# Altium PCB PCB_chargePump_2_2021-07-19.pcbdoc
Units mm, origin at the board's own origin, x right, y up, seen from the top; angles counter-clockwise.
Board outline 157.86 x 100.64 mm, 2 copper layers (Top Layer, Bottom Layer); 10 components, 5 nets, 28 pads, 1 vias.
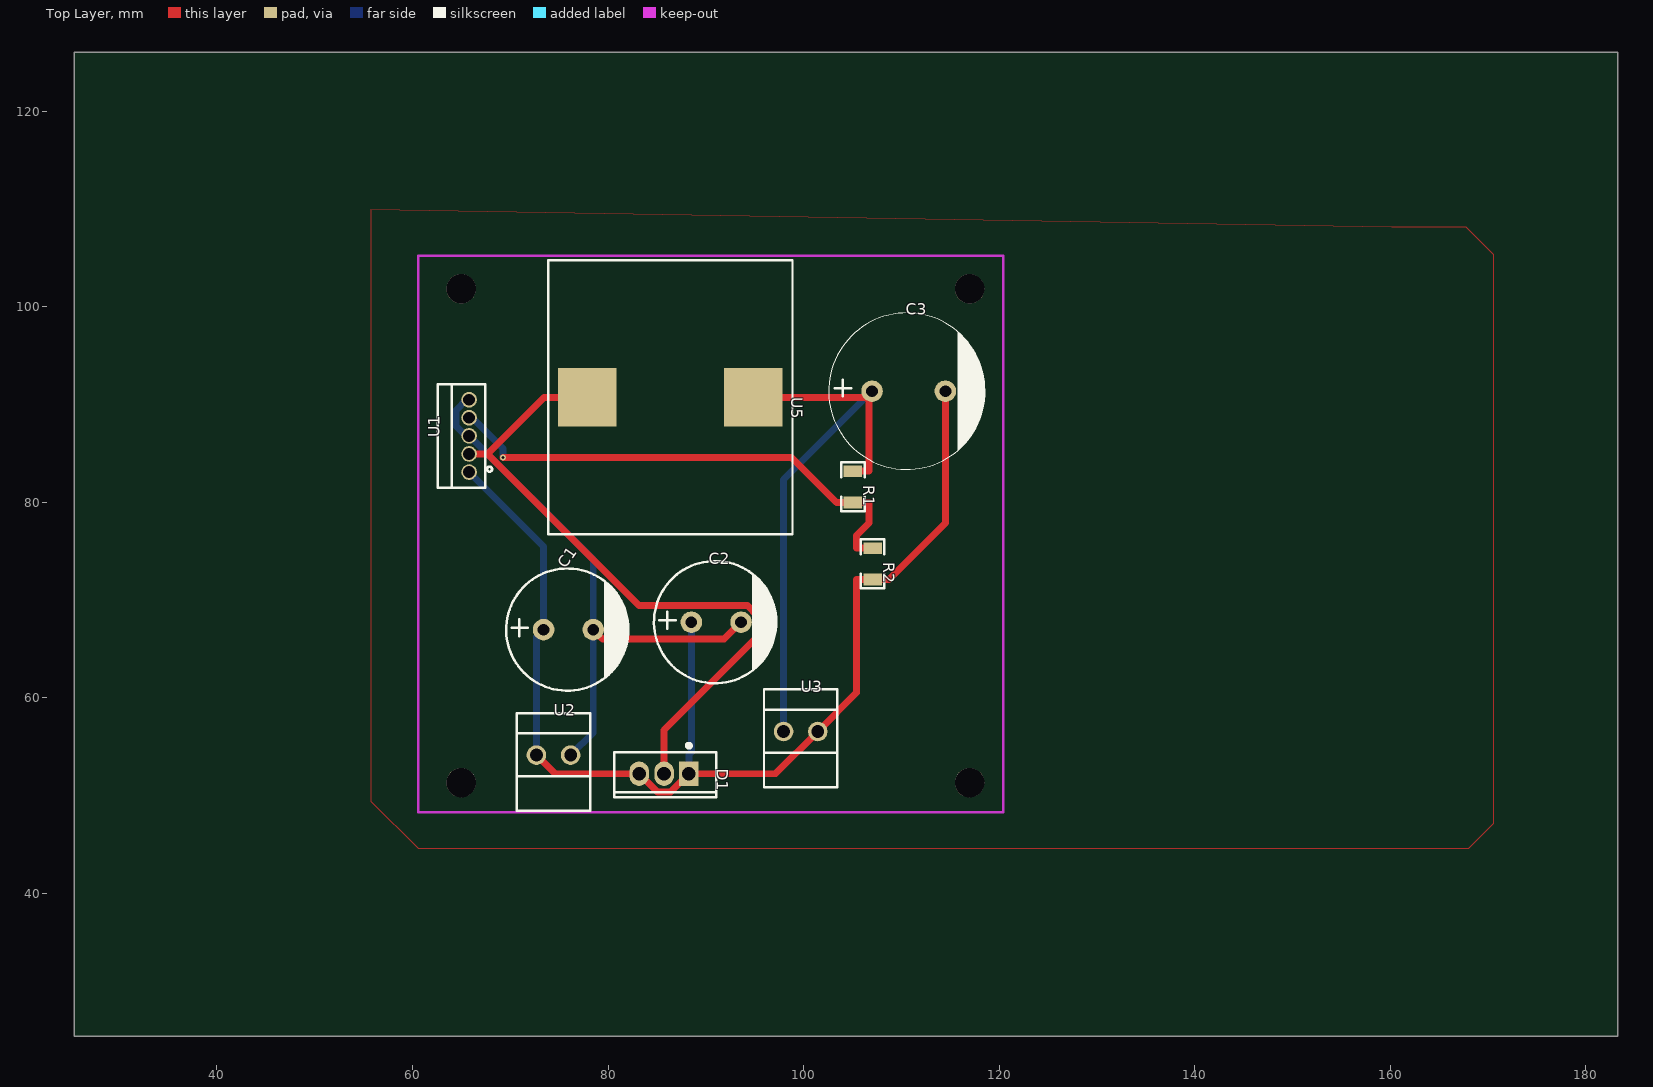
[diagram p0: Top Layer view]
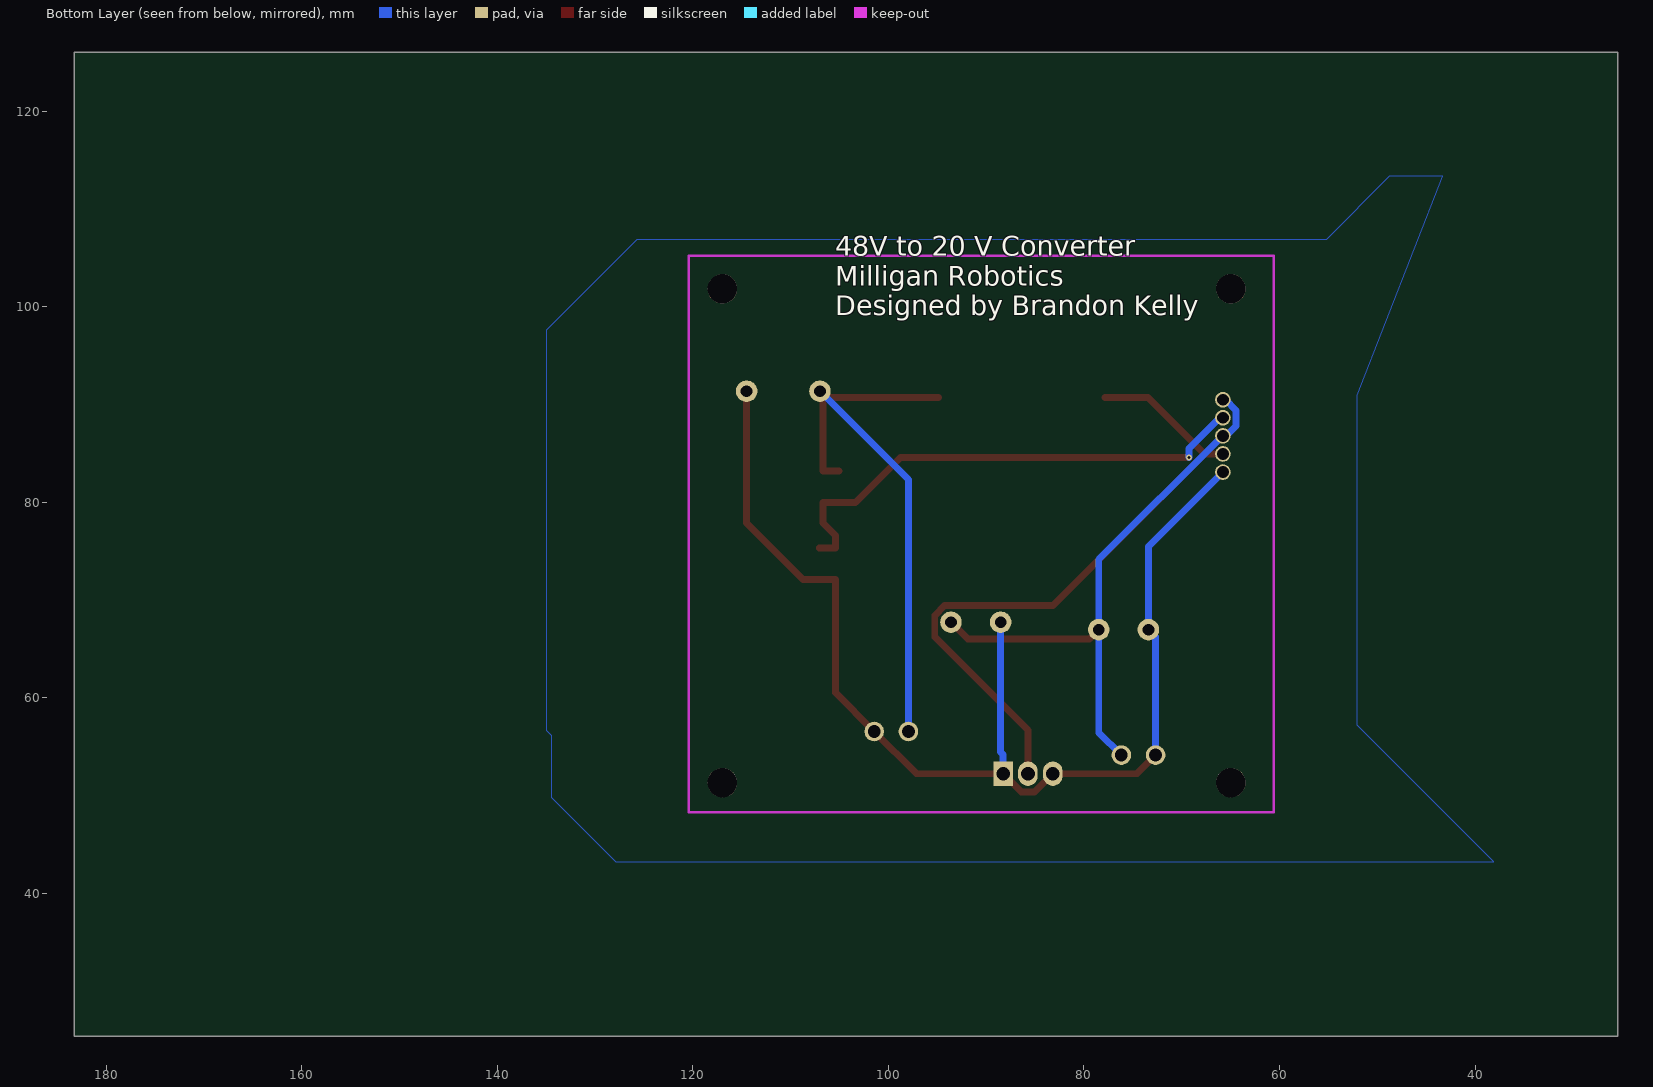
[diagram p1: Bottom Layer view, seen from below]

## Layer stack, top to bottom
Top Layer: signal copper (thickness not stored)
Dielectric: dielectric 0.32, FR-4, Dk 4.8
Bottom Layer: signal copper (thickness not stored)

## Board outline
183.261,25.4 25.4,25.4 25.4,126.037 183.261,126.037

## Components (designator, comment, footprint, x,y, rotation, side; value= is the part's Value field where it differs from the comment)
C1 "220uF" CAP-TH_BD12.5-P5.00-D1.2-FD 75.946,66.982 r0 top
C2 "220uF" CAP-TH_BD12.5-P5.00-D1.2-FD 91.059,67.744 r0 top
C3 "330uF" CAP-TH_BD16.0-P7.50-D1.2-FD 110.744,91.366 r0 top
D1 "STPS2030CT" TO-220AB-3_L10.4-W4.6-P2.54-T 85.725,52.25 r270 top
R1 "15.4K" R1206 105.029,81.587 r270 top
R2 "1K" R1206 107.061,73.713 r270 top
U1 "LM2576HVT-ADJ" TO-220-5L_L10.2-W4.5-P1.71-L 65.786,86.794 r90 top
U2 "TV0211500000G" CONN-TH_TV0211500000G 74.422,54.155 r0 top
U3 "TV0211500000G" CONN-TH_TV0211500000G 99.695,56.568 r0 top
U5 "power inductor 330uH" "WURTH 330UH" 86.36,90.731 r270 top

## Footprints (in the part's own frame and the unit in brackets; to place one, negate y for a bottom-side part, rotate by r counter-clockwise, add the part's x,y. Pads: shape width x height; smd on the part's side, far side on the other; paste and mask are expansions set on the pad)
CAP-TH_BD12.5-P5.00-D1.2-FD [mm]
  round 2.2 hole 1.2: 1(-2.54,0) 2(2.54,0)
  silkscreen extent -6.37,-6.25 6.17,6.25
CAP-TH_BD16.0-P7.50-D1.2-FD [mm]
  round 2.2 hole 1.2: 1(-3.75,0) 2(3.75,0)
  silkscreen extent -8.19,-8 7.81,8
CONN-TH_TV0211500000G [mm]
  round 2 hole 1.3: 1(-1.75,0) 2(1.75,0)
  silkscreen extent -3.75,-5.7 3.75,4.3
R1206 [mm]
  rect 1.2x1.9 smd: 1(-1.6,0) 2(1.6,0)
  silkscreen extent -2.5,-1.2 2.5,1.2
TO-220-5L_L10.2-W4.5-P1.71-L [mm]
  round 1.6 hole 1.2: 1(-3.7,0) 2(-1.85,0) 3(0,0) 4(1.85,0) 5(3.7,0)
  silkscreen extent -5.3,-2.35 5.3,3.18
TO-220AB-3_L10.4-W4.6-P2.54-T [mm]
  rect 2.5x2 hole 1.4: 1(0,2.54)
  oval 2.5x2 hole 1.4: 2(0,0) 3(0,-2.54)
  silkscreen extent -3.07,-5.08 2.4,5.33
"WURTH 330UH" [mm]
  rect 6x6 smd: 1(0,-8.5) 2(0,8.5)
  silkscreen extent -14,-12.5 14,12.5

## Free pads (board coordinates)
  round 3 hole 3 unplated: ""(64.976,51.336) ""(64.976,101.836) ""(116.976,51.336) ""(116.976,101.836)

## Via types
v1: diameter 0.61, hole 0.31, Top Layer to Bottom Layer, 1 vias

## Nets (pads, with @x,y where several pads share a name; then routed paths per layer and width w, separated by ;. In a path a pad name is that pad's centre, name@x,y a point inside that pad or via, vN(x,y) a via of type N, cw(c..) or ccw(c..) an arc to the next point about the centre after c; other vN are vias at no path point)
GND: C1.2 C2.2 U1.3 U1.5 U2.2 | length 60.3
  Top Layer w0.7: C1.2 79.449,66.019 91.874,66.019 C2.2
  Bottom Layer w0.7: U1.5 65.537,90.495 64.442,89.4 64.442,87.807 65.458,86.794 U1.3 65.822,86.794 78.486,74.13 C1.2 78.486,56.469 U2.2
U1_1: C1.1 C2.1 C3.2 D1.1 D1.3 R2.2 U1.1 U2.1 U3.2 | length 123
  Top Layer w0.7: U2.1 74.577,52.25 D1.3 85.044,50.391 86.406,50.391 D1.1 97.127,52.25 U3.2 105.41,60.533 105.41,72.113 R2.2 108.712,72.113 114.493,77.894 C3.2
  Bottom Layer w0.7: U1.1 73.406,75.473 C1.1 72.672,66.248 U2.1 ; D1.1 88.265,54.201 88.519,54.455 C2.1
U1_2: D1.2 U1.2 U5.1 | length 69
  Top Layer w0.7: U1.2 67.671,84.945 ; U5.1 73.459,90.731 67.671,84.945 ; D1.2 85.725,56.7 95.25,66.225 95.25,68.435 94.247,69.438 83.177,69.438 67.671,84.945
U1_4: R1.2 R2.1 U1.4 | length 51.9
  Top Layer w0.7: v1(69.243,84.594) 98.77,84.594 103.378,79.987 R1.2 106.68,79.987 106.68,77.884 105.41,76.614 105.41,75.313 R2.1
  Bottom Layer w0.7: U1.4 66.114,88.643 69.243,85.516 v1(69.243,84.594)
U3_1: C3.1 R1.1 U3.1 U5.2 | length 60.3
  Top Layer w0.7: U5.2@94.861,90.731 C3.1@106.36,90.731 ; R1.1 106.68,83.187 106.68,90.411 C3.1@106.36,90.731 ; C3.1 C3.1@106.36,90.731
  Bottom Layer w0.7: U3.1 97.945,82.316 C3.1

## Polygon pours and split planes (outlines as drawn)
GND on Bottom Layer (solid): 38.1,43.233 52.07,57.203 52.07,90.937 43.307,113.337 48.768,113.337 55.245,106.86 125.73,106.86 135.001,97.589 135.001,56.695 134.493,56.187 134.493,49.837 127.889,43.233 38.1,43.233
GND on Top Layer (solid): 55.753,109.908 55.753,49.456 60.579,44.63 168.021,44.63 170.561,47.17 170.561,105.336 167.767,108.13 160.147,108.13

## Silkscreen, mask and mechanical layers (free items; w line width, h text height)
Bottom Overlay:
  text "48V to 20 V Converter / Milligan Robotics / Designed by Brandon Kelly" at 105.41,99.113 h2.03